# EAGLE board Super-Regenerative-FM-Tuner-ForcedQuench-Gen-alt (EAGLE 7.6.0)
Forced quenching improves three-transistor FM tuner Lyle Williams -February 29, 2016 http://www.edn.com/design/diy/4441531/Forced-quenching-improves-three-transistor-FM-tuner
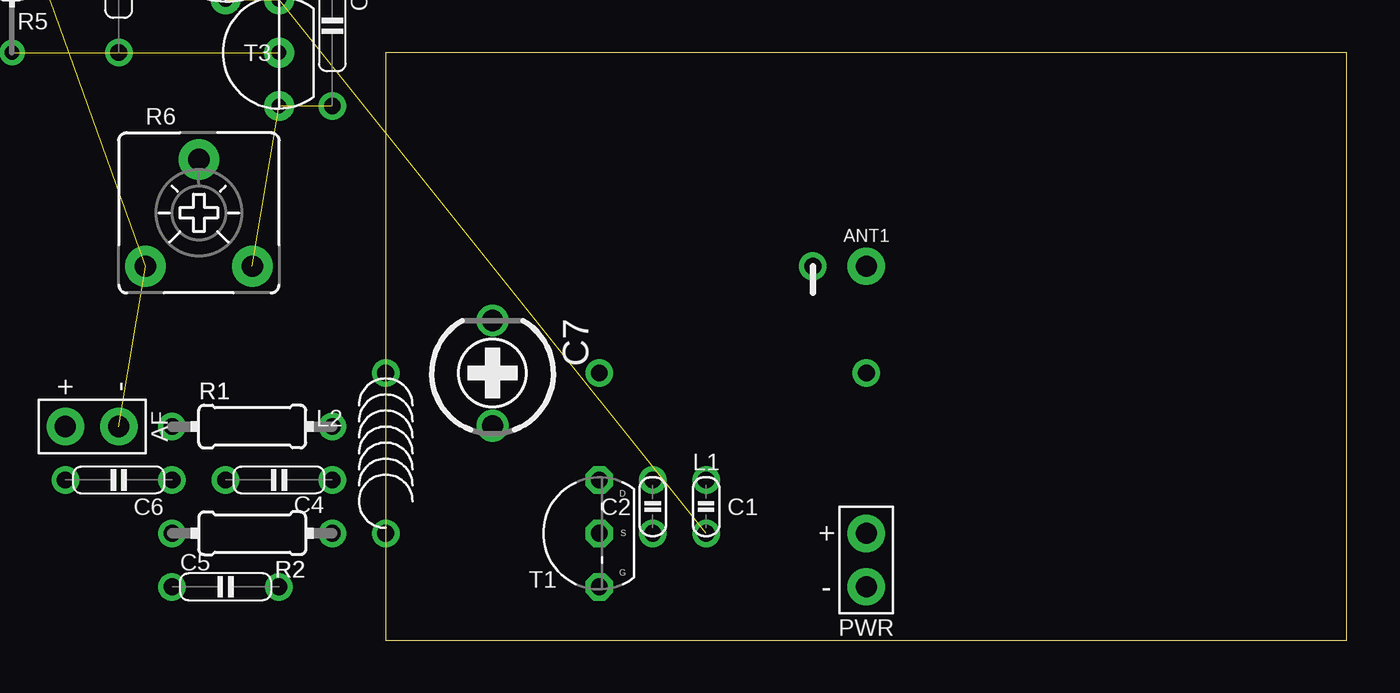
[diagram p0: board, top side]
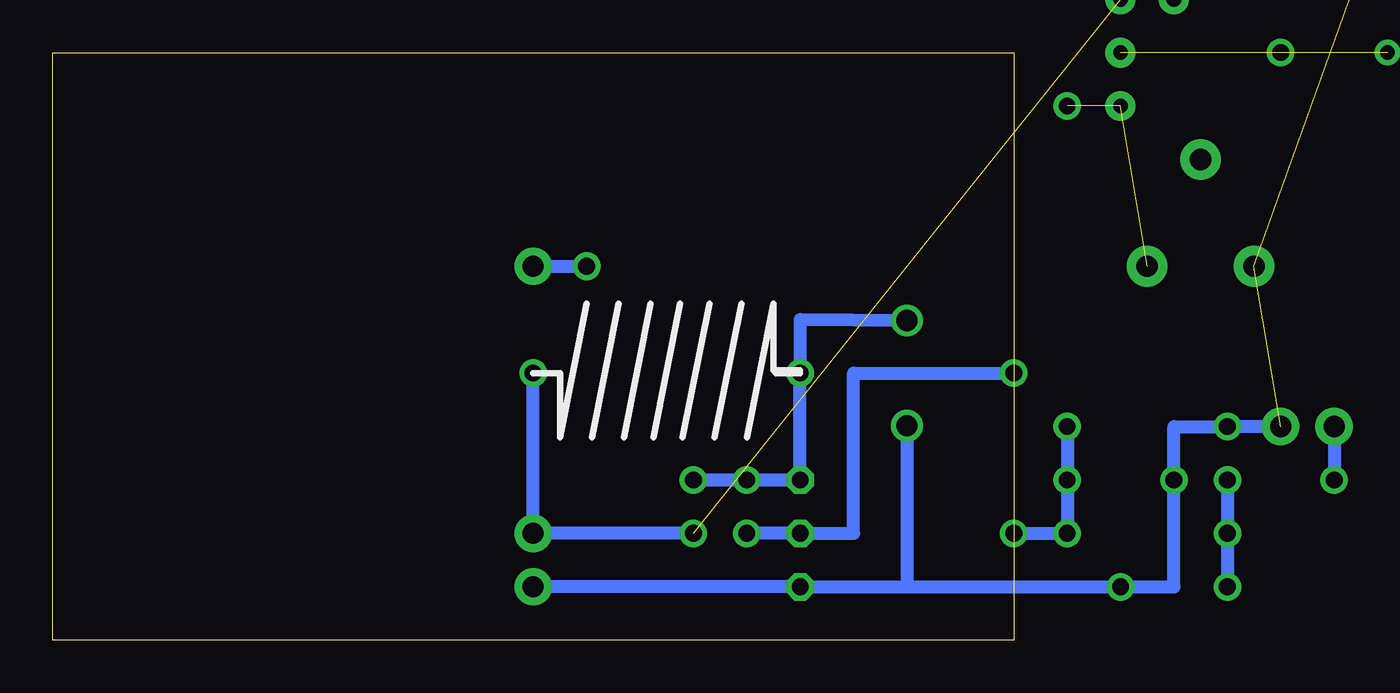
[diagram p1: board, bottom side, seen from below]

Size 45.72 x 27.94 mm. Coordinates in mm from the lower left corner, seen from the top.
Outline: 45.72,0 45.72,27.94 0,27.94 0,0 45.72,0
Copper layers (1*16): Top 0.035mm / dielectric 1.5mm / Bottom 0.035mm
Design rules "default": minimum track width 10mil, minimum drill 24mil, track to track 8mil, track to pad 8mil, pad to pad 8mil, via to via 8mil, smd to smd 8mil, copper to edge 40mil, drill to drill 8mil, minimum pad ring 10mil, minimum via ring 8mil, stop-mask expansion 4mil, vias tented up to drill 0mil, thermal gap 10mil

## Footprints (pad centres in the part's own frame; a part is rotated, then mirrored left to right if it is on the bottom)
SPAD+- = drill 1 pad 1.778: 1 0,-1.27; 2 0,1.27
SPAD = drill 1 pad 1.778: 1 0,0
C025-015X024 = drill 0.8: 1 0,1.27; 2 0,-1.27
C0750-020X044 = drill 0.8: 1 -3.81,0; 2 3.81,0
C050-020X044@1 = drill 0.8: 1 -2.54,0; 2 2.54,0
C050-020X044 = drill 0.8: 1 -2.54,0; 2 2.54,0
CTRIMTZ03 = drill 1: 1 0,2.5; 2 0,-2.5
L-08/10-TAP1 = drill 0.8: 1 -6.35,0; 2 6.35,0; 3 -3.81,-5.08
L-04/7-V = drill 0.8: 1 0,3.81; 2 0,-3.81
SPAD-+ = drill 1 pad 1.778: 1 0,-1.27; 2 0,1.27
0204/7 = drill 0.8: 1 -3.81,0; 2 3.81,0
0202/7-V = drill 0.7: 1 0,-3.81; 2 0,3.81
POT-V = drill 1.016 pad 1.93: A -2.54,-2.54; E 2.54,-2.54; S 0,2.54
TO92-GSD = drill 0.8 octagon: 1 0,2.54; 2 0,0; 3 0,-2.54
TO92-CBE = drill 0.7 pad 1.422: B 0,0; C 0,2.54; E 0,-2.54

## Placement (x,y rotation side)
AF  SPAD+-+-  [SPAD+-]  -13.97,10.16 90 top  (outside the outline)
ANT1  ANT  [SPAD]  22.86,17.78 270 top
C1  20pF  [C025-015X024]  15.24,6.35 180 top
C2  10pF  [C025-015X024]  12.7,6.35 0 top
C3  2.7nF  [C0750-020X044]  -2.54,29.21 270 top
C4  2.7nF  [C050-020X044@1]  -5.08,7.62 180 top
C5  10nF  [C050-020X044@1]  -7.62,2.54 0 top  (outside the outline)
C6  100nF  [C050-020X044]  -12.7,7.62 180 top  (outside the outline)
C7  0.04 - 6pF  [CTRIMTZ03]  5.08,12.7 180 top
C8  2.7nF  [C0750-020X044]  -12.7,31.75 270 top  (outside the outline)
L1  0.1uH  [L-08/10-TAP1]  16.51,12.7 180 top
L2  8.2uH  [L-04/7-V]  0,8.89 0 top
PWR  [SPAD-+]  22.86,3.81 0 top
R1  10k  [0204/7]  -6.35,10.16 0 top
R2  12k  [0204/7]  -6.35,5.08 180 top
R3  5.1k  [0202/7-V]  -8.89,38.1 270 top  (outside the outline)
R4  15k  [0202/7-V]  -15.24,36.83 180 top  (outside the outline)
R5  15k  [0202/7-V]  -17.78,31.75 180 top  (outside the outline)
R6  5k  [POT-V]  -8.89,20.32 0 top  (outside the outline)
T1  BF245A  [TO92-GSD]  10.16,5.08 180 top
T2  BC557CBE  [TO92-CBE]  -7.62,33.02 0 top  (outside the outline)
T3  BC557CBE  [TO92-CBE]  -5.08,27.94 180 top  (outside the outline)

## Library data of the parts
AF ANT1 PWR = pad
C1-C6 C8 = c
C7 = cap-trim
L1 L2 = l
R1-R6 = r
T1-T3 = t

## Nets
GND: AF.1 C4.2 C5.2 C7.1 PWR.1 R1.1 R3.1 R4.1 R5.1 R6.A T1.1
N$1: C1.2 C2.1 C7.2 L1.2 T1.3
N$2: C4.1 L2.2 R1.2 R2.1
N$3: C8.1 R3.2 T2.C
N$4: ANT1.1 L1.3
N$5: C2.2 L2.1 T1.2
N$6: C5.1 C6.1 R2.2
N$7: C8.2 R5.2 T3.B
N$8: AF.2 C6.2
N$9: C3.2 R6.E T3.C
N$10: C3.1 R4.2 T2.B
N$11: R6.S
VCC: C1.1 L1.1 PWR.2 T2.E T3.E

## Tracks (layer width: path | path; a pad name or v marks a point on that pad's centre or on a via)
GND  (4 unrouted)
  Bottom 0.61: AF.1 R1.1 -7.62,10.16 C4.2 -7.62,2.54 C5.2 5.08,2.54 | PWR.1 T1.1 5.08,2.54 | C7.1 5.08,2.54
N$1
  Bottom 0.61: C1.2 C2.1 T1.3 L1.2 10.16,15.24 C7.2
N$2
  Bottom 0.61: R1.2 C4.1 R2.1 L2.2
N$3  (2 unrouted)
N$4
  Bottom 0.61: ANT1.1 L1.3
N$5
  Bottom 0.61: T1.2 7.62,5.08 | 7.62,5.08 7.62,12.7 L2.1 | T1.2 7.62,5.08 | T1.2 C2.2
N$6
  Bottom 0.61: R2.2 C5.1 C6.1
N$7  (2 unrouted)
N$8
  Bottom 0.61: AF.2 C6.2
N$9  (2 unrouted)
N$10  (2 unrouted)
VCC  (2 unrouted)
  Bottom 0.61: L1.1 PWR.2 C1.1